# Altium PCB HBRIDGE_PCB.PcbDoc (part 2 of 2)
Units mm, origin at the board's own origin, x right, y up, seen from the top; angles counter-clockwise.
Board outline 96 x 74 mm, 4 copper layers (Top Layer, GND, VCC, Bottom Layer), stack 1.602 mm thick; 114 components, 69 nets, 304 pads, 210 vias.
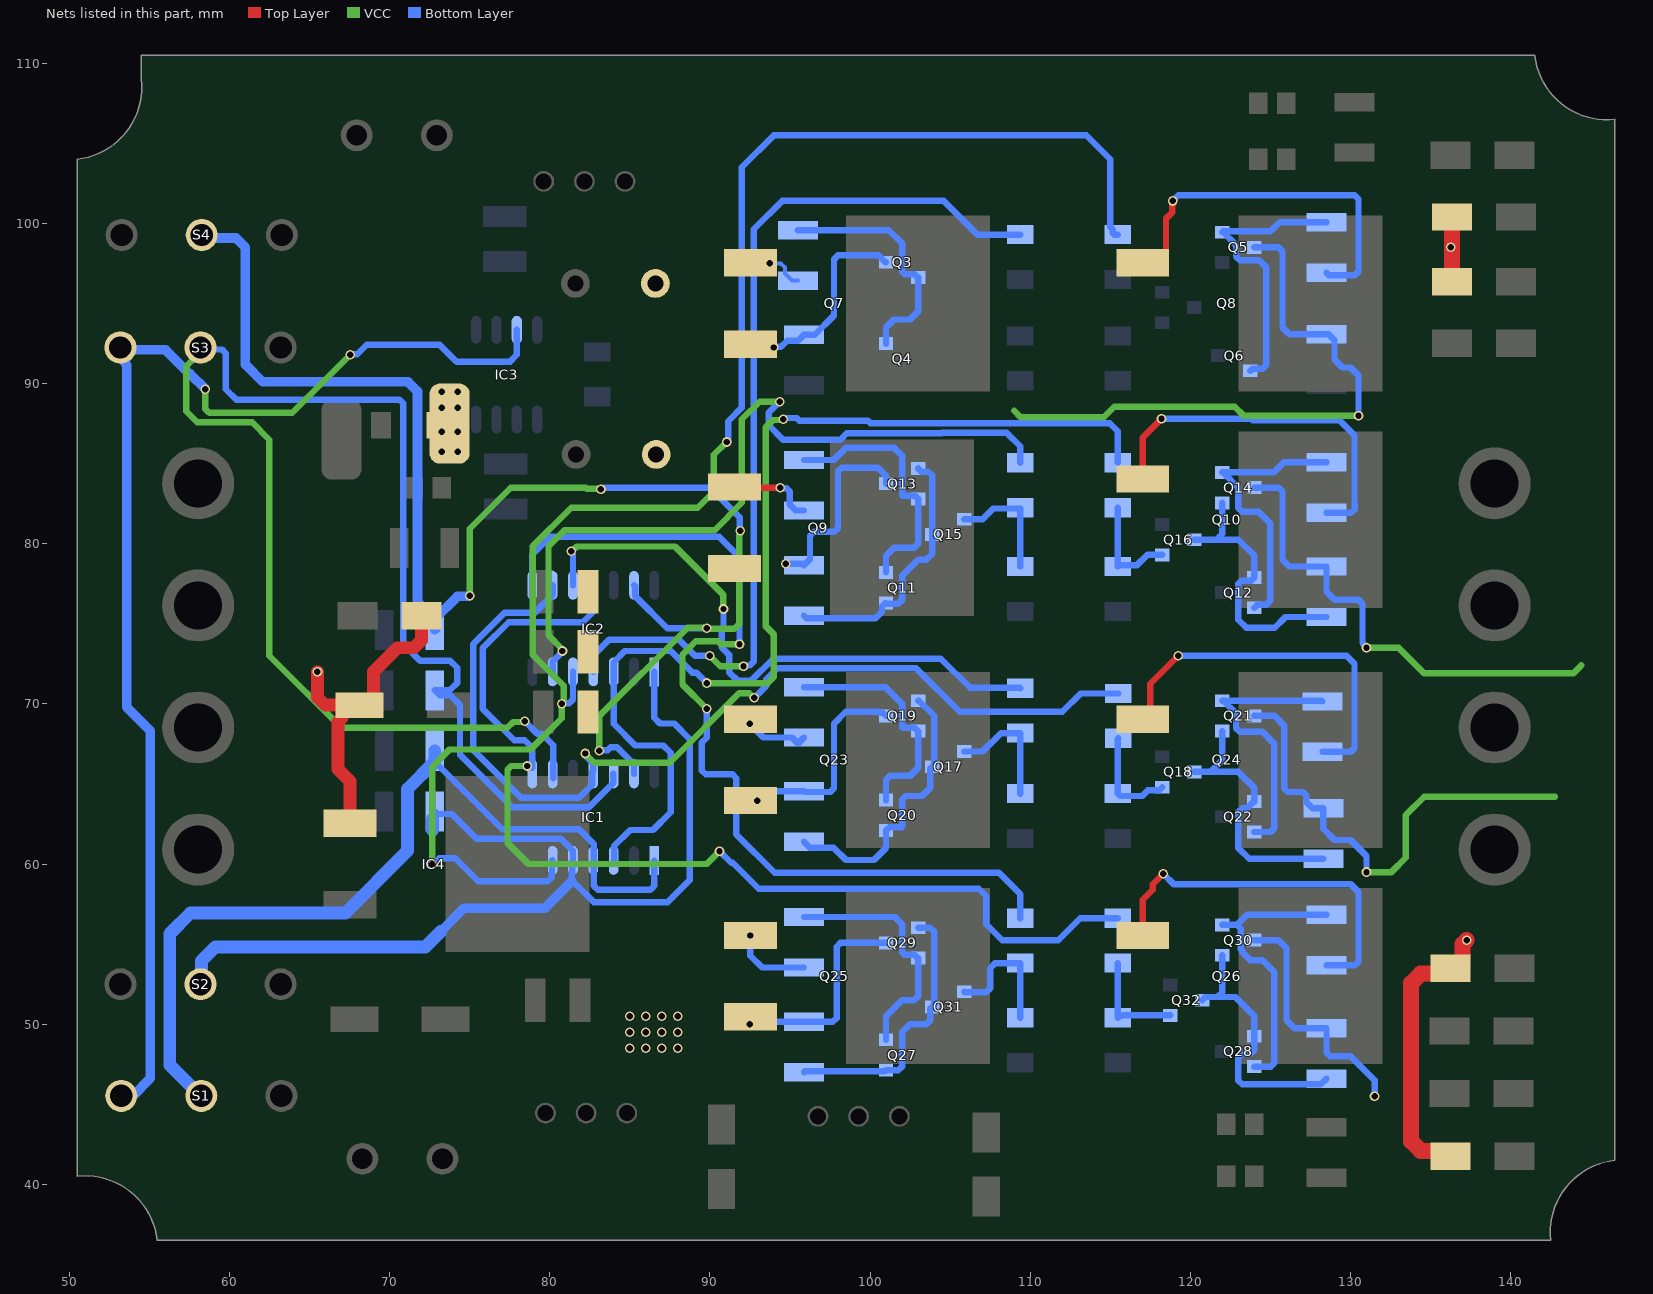
[diagram p4: the nets of this part, all layers, seen from the top]

## Via types
v1: diameter 0.6, hole 0.4, Top Layer to Bottom Layer, tented bottom, 127 vias
v2: diameter 0.6, hole 0.4, Top Layer to Bottom Layer, tented both sides, 83 vias

## Nets (pads, with @x,y where several pads share a name; then routed paths per layer and width w, separated by ;. In a path a pad name is that pad's centre, name@x,y a point inside that pad or via, vN(x,y) a via of type N, cw(c..) or ccw(c..) an arc to the next point about the centre after c; other vN are vias at no path point) (continued)
NetQ3_2: Q3.2 Q4.2 R8.1 | length 15.3
  Bottom Layer w0.4: R8.1@95.5,99.575 101.175,99.575 102,98.75 102,97 102.175,96.825 102.8,96.825 Q3.2@103,96.625 103,94.5 102.5,94 101.5,94 101,93.5 Q4.2@101,92.491
NetQ5_2: Q5.2 Q6.2 R7.1 | length 18
  Bottom Layer w0.4: Q5.2@122,99.45 122.05,99.5 125,99.5 125.575,100.075 R7.1@128.5,100.075 ; Q5.2@122.05,99.45 122.85,98.65 122.85,97.934 123.084,97.7 124.3,97.7 124.75,97.25 124.75,91.167 124.516,90.933 123.883,90.933 Q6.2@123.75,90.8
NetQ7_1: Q7.1 R8.2 | length 2.4
  Bottom Layer w0.254: v2(93.75,97.5) 94.425,97.5 94.693,97.232 94.693,96.873 95.141,96.425 R8.2@95.5,96.425
NetQ8_1: Q8.1 R7.2 | length 23.6
  Top Layer w0.4: Q8.1@117.028,97.54 117.828,97.54 118.478,98.19 118.478,100.3 118.862,100.684 118.862,101.362 v2(118.9,101.4)
  Bottom Layer w0.4: v2(118.9,101.4) 119.25,101.75 130.266,101.75 130.5,101.516 130.5,97 130.25,96.75 128.675,96.75 R7.2@128.5,96.925
NetQ9_1: Q9.1 R10.1 | length 5.4
  Top Layer w0.4: Q9.1@91.528,83.54 91.568,83.5 v2(94.4,83.5)
  Bottom Layer w0.4: v2(94.4,83.5) 94.438,83.462 94.785,83.462 94.987,83.26 94.987,82.45 95.362,82.075 R10.1@95.875,82.075
NetQ10_1: Q10.1 R11.1 | length 23.2
  Top Layer w0.4: Q10.1@117.028,84.04 117.028,86.628 v2(118.2,87.8)
  Bottom Layer w0.4: v2(118.2,87.8) 123.785,87.8 123.885,87.7 129.316,87.7 130.25,86.766 130.25,82.5 130.259,82.491 130.259,82.159 130.025,81.925 R11.1@128.5,81.925
NetQ11_1: Q11.1 Q13.1 Q15.3 R12.2 | length 16.8
  Bottom Layer w0.4: R12.2@95.875,75.5 96.041,75.334 100.334,75.334 100.75,75.75 100.75,76.1 100.766,76.1 100.966,76.3 Q11.1@101,76.3 101.05,76.25 101.766,76.25 102,76.484 102,78 103,79 103.5,79 103.875,79.375 Q15.3@103.875,80.575 103.875,84.266 103.641,84.5 103.2,84.5 Q13.1@103,84.7
NetQ11_2: Q11.2 Q13.2 R10.2 | length 16.4
  Bottom Layer w0.4: R10.2@95.875,85.225 97.725,85.225 98.5,86 101.5,86 102,85.5 102,82.984 102.816,82.984 Q13.2@103,82.8 103,80 102.75,79.75 101.5,79.75 101,79.25 Q11.2@101,78.2
NetQ12_1: Q12.1 Q14.1 Q16.3 R13.2 | length 17.4
  Bottom Layer w0.4: Q16.3@120.25,80.25 121.625,80.25 ; Q14.1@122,82.55 122,80.625 121.625,80.25 ; R13.2@128.5,75.425 125.937,75.425 125.262,74.75 123.5,74.75 123,75.25 123,77.5 123.2,77.7 123.8,77.7 Q12.1@124,77.9 124,79.25 123,80.25 121.625,80.25
NetQ12_2: Q12.2 Q14.2 R11.2 | length 17.7
  Bottom Layer w0.4: Q14.2@122,84.45 Q14.2@122.05,84.45 ; Q12.2@124,76 124.2,76.2 124.75,76.2 124.984,76.434 124.984,81.266 124.25,82 123.234,82 123,82.234 123,83.5 Q14.2@122.05,84.45 ; R11.2@128.5,85.075 125.825,85.075 125.2,84.45 Q14.2@122.05,84.45
NetQ15_1: Q15.1 R14.2 R16.1 | length 7.4
  Bottom Layer w0.4: Q15.1@105.875,81.525 107.025,81.525 107.7,82.2 109.375,82.2 R14.2@109.375,78.575
NetQ16_1: Q16.1 R15.2 R17.1 | length 6.8
  Bottom Layer w0.4: R17.1@115.475,82.25 R15.2@115.475,78.575 115.566,78.666 116.666,78.666 117.3,79.3 Q16.1@118.25,79.3
NetQ17_1: Q17.1 R18.2 R20.2 | length 7.8
  Bottom Layer w0.4: Q17.1@105.875,67.025 107.025,67.025 108.175,68.175 R18.2@109.375,68.175 R20.2@109.375,64.4
NetQ17_3: Q17.3 Q19.1 Q20.1 R22.2 | length 17.9
  Bottom Layer w0.4: R22.2@95.875,61.4 96.25,61.025 97.725,61.025 98.5,60.25 100.25,60.25 101,61 Q20.1@101,62.091 101.2,62.291 101.966,62.291 102,62.325 102,64.016 102.234,64.25 103.25,64.25 103.75,64.75 103.75,65.95 Q17.3@103.875,66.075 104.016,66.216 104.016,69.25 104,69.25 103.05,70.2 Q19.1@103,70.2
NetQ18_1: Q18.1 R19.2 R21.2 | length 6.5
  Bottom Layer w0.4: R19.2@115.5,67.85 115.475,67.825 R21.2@115.475,64.4 115.625,64.25 117,64.25 117.35,64.6 118.05,64.6 Q18.1@118.25,64.8
NetQ18_3: Q18.3 Q21.1 Q22.1 R23.2 | length 17
  Bottom Layer w0.4: Q18.3@120.25,65.75 121.25,65.75 ; Q21.1@122,68.3 122,66.5 121.25,65.75 ; R23.2@128.3,60.325 123.675,60.325 123,61 123,63.25 123.234,63.484 123.534,63.484 123.95,63.9 Q22.1@124,63.9 124,64.75 123.125,65.625 123,65.75 121.25,65.75
NetQ19_2: Q19.2 Q20.2 R25.1 | length 15
  Bottom Layer w0.4: R25.1@95.875,71.05 100.95,71.05 102,70 102,68.534 102.034,68.5 102.8,68.5 Q19.2@103,68.3 103,66 102.5,65.5 101.25,65.5 101,65.25 Q20.2@101,63.991
NetQ21_2: Q21.2 Q22.2 R24.1 | length 17.7
  Bottom Layer w0.4: Q21.2@122,70.2 Q21.2@122.05,70.2 ; Q22.2@124,62 125,62 125.25,62.25 125.25,67.5 124.5,68.25 123.084,68.25 122.85,68.484 122.85,69.4 Q21.2@122.05,70.2 ; R24.1@128.25,70.15 128.2,70.2 Q21.2@122.05,70.2
NetQ23_1: Q23.1 R25.2 | length 4
  Bottom Layer w0.4: v2(92.5,68.75) 93.35,67.9 95.125,67.9 95.5,67.525 R25.2@95.875,67.9
NetQ24_1: Q24.1 R24.2 | length 23.4
  Top Layer w0.4: Q24.1@117.028,69.04 117.5,69.512 117.5,71.25 v2(119.25,73)
  Bottom Layer w0.4: v2(119.25,73) 129.75,73 130.25,72.5 130.25,67.25 130,67 R24.2@128.25,67
NetQ25_1: Q25.1 R27.1 | length 4.9
  Bottom Layer w0.4: v2(92.528,55.54) 92.528,54.276 93.261,53.543 R27.1@95.875,53.543
NetQ26_1: Q26.1 R28.1 | length 23.5
  Top Layer w0.4: Q26.1@117.028,55.54 117.028,57.778 117.647,58.397 117.647,58.747 v2(118.3,59.4)
  Bottom Layer w0.4: v2(118.3,59.4) 118.95,58.75 130,58.75 130.5,58.25 130.5,53.909 130.266,53.675 R28.1@128.5,53.675
NetQ27_1: Q27.1 Q29.1 Q31.3 R29.2 | length 17.2
  Bottom Layer w0.4: R29.2@95.875,47 95.938,47.062 100.937,47.062 Q27.1@101,47.125 101.766,47.125 102,47.359 102,49.5 102.5,50 103.516,50 103.75,50.234 103.75,50.95 Q31.3@103.875,51.075 104,51.2 104,55.791 103.766,56.025 Q29.1@103,56.025
NetQ27_2: Q27.2 Q29.2 R27.2 | length 15.6
  Bottom Layer w0.4: R27.2@95.875,56.693 101.557,56.693 101.749,56.5 102,56.25 102,54.5 102.175,54.325 102.8,54.325 Q29.2@103,54.125 103,51.734 102.766,51.5 102,51.5 101,50.5 Q27.2@101,49.025
NetQ28_1: Q28.1 Q30.1 Q32.3 R30.2 | length 17
  Bottom Layer w0.4: Q32.3@120.75,51.5 120.95,51.7 121.7,51.7 ; Q30.1@122,54.3 122,52 121.7,51.7 ; R30.2@128.5,46.6 128.15,46.25 123.234,46.25 123,46.484 123,47.916 123.234,48.15 123.766,48.15 124,48.384 Q28.1@124,49.25 124,50.5 122.8,51.7 121.7,51.7
NetQ28_2: Q28.2 Q30.2 R28.2 | length 18.1
  Bottom Layer w0.4: Q30.2@122,56.2 122.916,56.2 ; Q28.2@124,47.35 125.016,47.35 125.25,47.584 125.25,53.25 124.5,54 123.75,54 123.227,54.523 123.227,54.607 123.15,54.684 123.15,55.966 122.916,56.2 ; R28.2@128.5,56.825 123.541,56.825 122.916,56.2
NetQ31_1: Q31.1 R31.2 R33.1 | length 8.4
  Bottom Layer w0.4: Q31.1@105.875,52.025 105.9,52 107.266,52 107.5,52.234 107.5,53.5 107.818,53.818 R33.1@109.375,53.818 R31.2@109.375,50.4
NetQ32_1: Q32.1 R32.2 R34.1 | length 6.7
  Bottom Layer w0.4: R34.1@115.475,53.818 R32.2@115.475,50.4 cw(c115.837,50.038) 115.837,50.55 Q32.1@118.75,50.55
NetR1_1: IC2.4 R1.1 | length 57.5
  VCC w0.4: v2(90,73) 90.645,72.355 v2(92.099,72.355)
  Bottom Layer w0.4: IC2.4@82.725,72 82.763,72.038 82.763,73.063 83.7,74 88.075,74 89.075,73 v2(90,73) ; v2(92.099,72.355) 92.137,72.393 92.498,72.393 92.75,72.646 92.75,99.64 94.51,101.4 104.6,101.4 106.7,99.3 R1.1@109.375,99.3
NetR2_1: IC1.6 IC2.5 R2.1 | length 101.9
  VCC w0.4: v2(72.676,59.989) 72.676,66.076 73.75,67.15 78.8,67.15 80.75,69.1 v2(80.75,70) ; v2@80.875,70.175 80.875,71.125 78.95,73.05 78.95,79.851 81.349,82.25 89.25,82.25 90.25,83.25 90.25,85.55 v2(91.05,86.35)
  Bottom Layer w0.4: v2(72.676,59.989) 72.731,59.989 73.103,60.361 74.1,60.361 75.536,58.925 79.885,58.925 80.12,59.159 80.12,59.418 80.147,59.445 80.147,60.218 IC1.6@80.175,60.247 ; v2(80.75,70) 80.788,70.038 81.221,70.038 81.455,70.273 IC2.5@81.455,72 ; v2(91.05,86.35) 91.054,86.354 91.15,86.354 91.15,87.65 92,88.5 92,103.5 94,105.5 113.5,105.5 115,104 115,99.775 115.15,99.625 115.15,99.4 115.25,99.3 R2.1@115.475,99.3
NetR16_2: IC2.6 R16.2 | length 49.1
  VCC w0.4: v2(80.796,73.3) 80.758,73.338 80.758,73.442 79.925,74.275 79.925,79.85 80.925,80.85 90.3,80.85 92,82.55 92,87.765 93.108,88.873 v2(94.358,88.873)
  Bottom Layer w0.4: IC2.6@80.185,72 80.185,72.644 80.796,73.256 v2(80.796,73.3) ; v2(94.358,88.873) 93.675,88.19 93.675,87.39 94.565,86.5 98.151,86.5 98.551,86.9 104.475,86.9 104.5,86.925 108.525,86.925 109.375,86.075 R16.2@109.375,85.05
NetR17_2: IC1.3 IC2.3 R17.2 | length 68.8
  VCC w0.4: v2(89.8,71.3) 93.615,71.3 94,71.685 94,74.33 93.5,74.83 93.5,87.283 93.942,87.725 94.537,87.725 v2(94.575,87.763)
  Bottom Layer w0.4: IC1.3@84.033,60.225 84.033,61.138 85.02,62.125 86.45,62.125 87.55,63.225 87.55,66.95 87.1,67.4 85.349,67.4 83.995,68.754 IC2.3@83.995,72 83.995,72.6 84.695,73.3 87.552,73.3 88.898,71.954 89.146,71.954 v2(89.8,71.3) ; v2(94.575,87.763) 94.629,87.763 94.716,87.85 95.423,87.85 95.585,87.687 99.863,87.687 100.025,87.525 114.975,87.525 115.475,87.025 R17.2@115.475,85.05
NetR18_1: IC2.10 R18.1 | length 37.8
  VCC w0.4: v2(81.35,79.525) 81.384,79.525 81.684,79.825 87.825,79.825 90.825,76.825 90.825,75.95 v2(90.85,75.925)
  Bottom Layer w0.4: v2(81.35,79.525) 81.35,79.471 81.455,79.366 IC2.10@81.455,77.4 ; v2(90.85,75.925) 90.85,74.747 90.75,74.647 90.75,73.523 91.199,73.074 91.199,71.982 91.726,71.455 92.585,71.455 93.955,72.825 104.425,72.825 106.25,71 109.35,71 R18.1@109.375,70.975
NetR19_1: IC1.11 IC2.9 R19.1 | length 62.7
  VCC w0.4: v2(82.229,66.9) 82.229,66.88 82.788,66.321 87.487,66.321 91.825,70.658 92.451,70.658 92.681,70.428 92.745,70.428 v2(92.783,70.39)
  Bottom Layer w0.4: IC2.9@80.185,77.4 80.185,76.8 79.085,75.7 77.19,75.7 75.225,73.735 75.225,67.125 77.379,64.971 78.2,64.15 81.85,64.15 82.66,64.96 82.66,65.77 82.725,65.835 82.725,66.279 82.267,66.737 82.267,66.862 v2(82.229,66.9) ; v2(92.783,70.39) 93.512,71.119 93.512,71.534 94.203,72.225 102.875,72.225 105.6,69.5 112,69.5 113.15,70.65 R19.1@115.5,70.65
NetR33_2: IC2.8 R33.2 | length 59.8
  VCC w0.4: v2(89.8,69.7) 88.291,71.209 88.291,73.063 89.127,73.9 90.506,73.9 90.675,73.731 v2(91.85,73.731)
  Bottom Layer w0.4: IC2.8@78.915,77.4 78.915,79.315 80.025,80.425 90.575,80.425 91.85,79.15 v2(91.85,73.731) ; v2(89.8,69.7) 89.8,67.89 89.5,67.59 89.5,65.834 89.734,65.6 91.416,65.6 91.65,65.365 91.65,61.85 94.05,59.45 108.05,59.45 109.375,58.125 R33.2@109.375,56.618
NetR34_2: IC1.8 IC2.11 R34.2 | length 67.8
  VCC w0.4: v2(78.593,66.121) 77.606,66.121 77.366,65.881 77.366,61.309 78.675,60 89.8,60 v2(90.6,60.8)
  Bottom Layer w0.4: v2(78.593,66.121) 78.643,66.071 78.844,66.071 78.915,66 78.915,67.246 78.433,67.728 77.782,67.728 75.825,69.685 75.825,73.487 77.438,75.1 82.069,75.1 82.725,75.756 IC2.11@82.725,77.4 ; v2(90.6,60.8) 91.328,60.072 91.428,60.072 93.05,58.45 106.781,58.45 107.25,57.981 107.25,56.25 108.25,55.25 111.75,55.25 113.118,56.618 R34.2@115.475,56.618
NetR36_2: IC1.1 IC1.4 R36.2 S1.2 | length 55.4
  Bottom Layer w0.4: R36.2@72.825,66.383 77.033,62.175 81.834,62.175 82.763,61.245 82.763,58.634 82.998,58.4 86.291,58.4 86.525,58.634 IC1.1@86.525,60.214
  Bottom Layer w0.8: S1.2@58.412,45.313 56.275,47.45 56.275,55.65 57.575,56.95 67.25,56.95 71.125,60.825 71.125,64.683 72.825,66.383 R36.2@72.825,67.058
NetR37_2: IC1.9 IC1.12 R37.2 S3.2 | length 100.1
  VCC w0.4: S3.2@57.984,92.126 57.984,91.766 57.3,91.081 57.3,88.276 58.001,87.575 61.425,87.575 62.5,86.5 62.5,73 67,68.5 77.35,68.5 77.72,68.87 78.412,68.87 v2(78.45,68.908)
  Bottom Layer w0.4: S3.2@58.2,92.25 58.322,92.128 59.541,92.128 59.775,91.894 59.775,89.648 60.423,89 70.616,89 70.85,88.766 70.85,73.758 71.908,72.7 73.775,72.7 74.225,72.25 74.225,71.3 73.767,70.842 R37.2@72.825,70.842 73.132,70.534 73.791,70.534 74.4,69.925 74.4,66.825 77.675,63.55 82.45,63.55 83.825,64.925 83.841,64.925 83.975,65.059 IC1.12@83.975,65.633 ; v2(78.45,68.908) 79.211,68.147 79.503,68.147 80.225,67.425 80.225,66.406 80.223,66.405 IC1.9@80.223,65.368
NetR38_2: IC1.13 IC2.13 R38.2 S4.2 | length 92.3
  VCC w0.4: v2(75,76.75) 75,80.925 77.575,83.5 82.246,83.5 82.308,83.438 83.162,83.438 v2(83.2,83.4) ; v2(83.1,67.075) 83.1,69.24 88.616,74.756 89.762,74.756 89.838,74.68 91.526,74.68 91.834,74.988 91.834,80.534 91.862,80.562 91.862,80.762 v2(91.9,80.8)
  Bottom Layer w0.4: v2(83.1,67.075) 83.138,67.113 83.623,67.113 83.8,67.29 84.2,67.29 85.265,66.225 IC1.13@85.265,65.625 ; v2(83.2,83.4) 83.238,83.438 83.338,83.438 83.4,83.5 90,83.5 91.862,81.638 91.862,80.838 v2(91.9,80.8) ; IC2.13@85.265,77.4 85.33,77.335 85.33,76.735 87.347,74.718 v2(89.8,74.718)
  Bottom Layer w0.6: S4.2@58.275,99.275 58.466,99.084 60.414,99.084 61,98.498 61,91.186 62.086,90.1 71.164,90.1 71.75,89.514 71.75,76.375 R38.2@72.825,75.3 ; R38.2@72.912,74.712 R38.2@72.825,74.625 R38.2@72.825,75.3 ; v2(75,76.75) 74.962,76.712 74.237,76.712 R38.2@72.825,75.3
NetR39_2: IC1.5 IC2.1 R39.2 S2.2 | length 61.8
  Bottom Layer w0.4: R39.2@72.825,63.275 72.975,63.125 73.875,63.125 75.425,61.575 80.705,61.575 81.455,60.825 IC1.5@81.455,60.225 81.417,60.187 81.417,59.445 81.375,59.404 81.375,58.915 ; 81.417,58.957 82.748,57.625 87.376,57.625 88.75,58.999 88.75,67.8 87.775,68.775 86.886,68.775 86.535,69.126 IC2.1@86.535,72
  Bottom Layer w0.6: 73.2,55.794 74.656,57.25 79.71,57.25 81.375,58.915
  Bottom Layer w0.8: S2.2@58.2,52.5 58.256,52.556 58.256,53.956 59.125,54.825 72.231,54.825 73.2,55.794 ; R39.2@72.675,62.125 R39.2@72.675,62.8
NetS1_1: IC3.3 S1.1 S3.1 | length 79.1
  VCC w0.4: v2(58.5,89.651) 58.5,88.409 58.734,88.175 63.925,88.175 v2(67.55,91.8)
  Bottom Layer w0.4: v2(67.55,91.8) 67.588,91.838 67.988,91.838 68.575,92.425 73.125,92.425 74.185,91.365 77.527,91.365 77.95,91.788 IC3.3@77.95,93.35
  Bottom Layer w0.6: S3.1@53.2,92.25 53.563,91.887 53.468,91.791 53.468,91.294 53.59,91.172 53.59,69.796 55.072,68.314 55.072,46.628 53.944,45.5 S1.1@53.6,45.5 ; S3.1@53.563,92.103 56.014,92.103 57.517,90.6 57.551,90.6 v2(58.5,89.651)
VCC: C1.1 C2.2 C3.1 C4.2 C7.1 C8.2 D1.2 D5.2 D7.2 D11.2 D15.2 F1.2 IC4.1 pad.18@73.75,87.5 Q3.3 Q5.3 Q7.3 Q9.3 Q13.3 Q14.3 Q19.3 Q21.3 Q23.3 Q25.3 Q29.3 Q30.3 R5.1 R6.1 R12.1 R13.1 R22.1 R23.1 R29.1 R30.1 | length 207.2
  Top Layer w0.4: v2(92.5,50) 92.5,50.432 Q25.3@92.528,50.46
  Top Layer w0.8: v2(65.5,72) 65.5,70.394 65.969,69.925 C7.1@67.425,69.925 ; IC4.1@67.528,62.54 67.528,65.17 66.775,65.923 66.775,68.882 67.025,69.132 67.025,69.525 C7.1@67.425,69.925 ; D15.2@72,75.5 72,73.969 71.531,73.5 70.5,73.5 69,72 69,70.325 68.6,69.925 C7.1@68.125,69.925 C7.1@67.425,69.925
  Top Layer w1: D7.2@136.25,41.75 135.907,42.093 134.372,42.093 133.786,42.679 133.786,52.571 134.372,53.157 135.907,53.157 D11.2@136.25,53.5 136.65,53.5 137,53.85 137,55 v2(137.25,55.25) ; D1.2@136.325,96.35 D5.2@136.325,100.4
  VCC w0.4: 109,88.3 109.4,87.9 114.6,87.9 115.254,88.554 122.769,88.554 123.323,88 v2(130.5,88) ; v2(131,59.5) 132.561,59.5 133.457,60.396 133.457,63.057 134.6,64.2 142.764,64.2 ; v2(131,73.5) 133,73.5 134.6,71.9 143.9,71.9 144.4,72.4
  Bottom Layer w0.4: v2(92.5,50) 92.554,50 92.704,50.15 97.681,50.15 97.916,50.384 97.916,54.841 98.15,55.075 Q29.3@101,55.075 ; v2(92.95,63.96) 93.004,63.96 93.594,64.55 R22.1@95.875,64.55 95.925,64.5 97.516,64.5 97.75,64.734 97.75,68.766 98.484,69.5 100.516,69.5 100.566,69.45 100.8,69.45 Q19.3@101,69.25 ; v2(94,92.25) 94.038,92.288 94.438,92.288 94.825,92.675 95.5,92.675 R5.1@95.875,93.05 96.55,93.05 97.75,94.25 97.75,97.75 98,98 100.525,98 100.95,97.575 Q3.3@101,97.575 ; v2(94.75,78.75) 95.771,78.75 95.873,78.648 96.25,79.025 96.25,80.5 96.5,80.75 97.766,80.75 98,80.984 98,84.516 98.234,84.75 100.5,84.75 101,84.25 Q13.3@101,83.75 ; Q30.3@124,55.25 125.5,55.25 126,54.75 126,50.25 126.5,49.75 R30.1@128.5,49.75 128.5,48.234 128.734,48 130,48 131.5,46.5 v2(131.5,45.5) ; Q21.3@124,69.25 125.25,69.25 125.85,68.65 125.85,64.734 126.084,64.5 127.016,64.5 127.25,64.266 127.25,63.85 127.625,63.475 R23.1@128.3,63.475 128.3,62.2 129,61.5 130,61.5 131,60.5 v2(131,59.5) ; Q14.3@124,83.5 125.516,83.5 125.75,83.266 125.75,79 126,78.749 126.175,78.575 R13.1@128.5,78.575 128.5,77 129,76.5 130.5,76.5 130.75,76.25 130.75,73.804 131,73.554 v2(131,73.5) ; Q5.3@124,98.5 125.5,98.5 125.75,98.25 125.75,93.5 126,93.249 126.175,93.075 R6.1@128.5,93.075 128.625,93.075 129,92.7 129,91.5 129.5,91 130,91 130.5,90.5 v2(130.5,88)
  other v1: 85,48.5 86,48.5 87,48.5 88,48.5 85,49.5 86,49.5 87,49.5 88,49.5 85,50.5 86,50.5 87,50.5 88,50.5
  other v2: 73.25,85.75 74.25,85.75 73.25,87 74.25,87 73.25,88.5 74.25,88.5 73.25,89.5 74.25,89.5 136.25,98.5
pads on no net: Q8.3 Q10.3 Q24.3 Q26.3

## Polygon pours and split planes (outlines as drawn)
GND on GND "NONET_L-01_P-001" (solid, pour order 0): 55.75,37 55.75,38.46 ccw(c53.21,38.46) 53.21,41 50.75,41 50.75,103.25 52.71,103.25 ccw(c52.71,105.79) 55.25,105.79 55.25,109.75 ccw(c55.5,109.75) 55.5,109.5 141,109.5 141,108.29 ccw(c143.54,108.29) 143.54,105.75 146,105.75 ccw(c146,105.5) 145.75,105.5 145.75,42 144.29,42 ccw(c144.29,39.46) 141.75,39.46 141.75,37
VCC on VCC "NONET_L-01_P-001" (solid, pour order 1): 55.709,36.831 55.709,38.041 ccw(c53.169,38.041) 53.169,40.581 50.709,40.581 50.709,103.581 52.419,103.581 ccw(c52.419,106.121) 54.959,106.121 54.959,110.081 ccw(c55.209,110.081) 55.209,109.831 140.959,109.831 140.959,108.371 ccw(c143.499,108.371) 143.499,105.831 145.959,105.831 cw(c145.959,105.581) 146.209,105.581 146.209,41.581 144.749,41.581 ccw(c144.749,39.041) 142.209,39.041 142.209,36.581 ccw(c141.959,36.581) 141.959,36.831

## Keep-outs
Keep-Out Layer:
  lines w0.5: 54.5,110.5 54.5,109 cw(c50,108.5) 50.5,104 50.5,40.5 cw(c51,36) 55.5,36.5 65,36.5 142.5,36.5 cw(c147,37) 146.5,41.5 146.5,106.5 cw(c146,111) 141.5,110.5 60,110.5 54.5,110.5 ; 54.5,110.5 54.5,110.5

## Other copper
Top Layer:
  region net VCC: 86.948,47 ccw(c86.948,49.54) 88.744,47.744 89,48 89,99 88.707,99.293 ccw(c87,97.586) 87,100 86.052,100 ccw(c86.052,97.46) 84.256,99.256 84,99 84,48 84.256,47.744 ccw(c86.052,49.54) 86.052,47 87,47
  region net NetF1_1: 67,89.75 68.5,89.75 cw(c68.5,87.5) 70.75,87.5 70.75,85.75 cw(c68.453,85.75) 68.453,83.453
  region net NetF1_1: 56.25,79.25 cw(c56.25,80.25) 55.25,80.25 55.25,86 cw(c56.25,86) 56.25,87 64.25,87 cw(c64.25,86.75) 64.5,86.75 ccw(c64.5,87.5) 65.25,87.5 65.25,88.75 cw(c66.25,88.75) 66.25,89.75 67.75,89.75 cw(c67.75,89) 68.5,89 68.5,83.453 65.5,83.25 ccw(c65.5,81.75) 64,81.75 64,80 cw(c63.25,80) 63.25,79.25
  region net VCC: 84.5,71.875 83.75,71.125 82.104,71.125 ccw(c82.104,70.272) 81.5,70.875 81.5,68.125 81.573,68.052 ccw(c82,68.479) 82,67.875 83.75,67.875 84.5,67.125
  region net VCC: 84.396,75.75 83.646,75 82,75 ccw(c82,74.147) 81.396,74.75 81.396,72 81.47,71.927 ccw(c81.896,72.354) 81.896,71.75 83.646,71.75 84.396,71
  region net VCC: 84.5,79.375 83.75,78.625 82.104,78.625 ccw(c82.104,77.772) 81.5,78.375 81.5,75.625 81.573,75.552 ccw(c82,75.979) 82,75.375 83.75,75.375 84.5,74.625
  region net GND: 114,52.5 115.5,52 119,52 cw(c119,51) 120,51 120,49.5 cw(c119.5,49.5) 119.5,49 115.5,49 114,48.5
  region net GND: 114,66 115.5,65.5 119,65.5 cw(c119,64.5) 120,64.5 120,63 cw(c119.5,63) 119.5,62.5 115.5,62.5 114,62
  region net GND: 114,80.5 115.5,80 119,80 cw(c119,79) 120,79 120,77.5 cw(c119.5,77.5) 119.5,77 115.5,77 114,76.5
  region net GND: 109.5,40.5 ccw(c110.5,40.5) 110.5,39.5 113.5,39.5 ccw(c113.5,40.05) 114.05,40.05 ccw(c114.05,40.5) 114.5,40.5 114.5,106.5 ccw(c113.5,106.5) 113.5,107.5 110.5,107.5 ccw(c110.5,106.5) 109.5,106.5 109.5,94
  region net GND: 114,94.5 115.5,94 119,94 cw(c119,93) 120,93 120,91.5 cw(c119.5,91.5) 119.5,91 115.5,91 114,90.5
  region net VCC: 88.5,94.5 90,94 93.5,94 cw(c93.5,93) 94.5,93 94.5,91.5 cw(c94,91.5) 94,91 90,91 88.5,90.5
  region net VCC: 88,80.5 89.5,80 93,80 cw(c93,79) 94,79 94,77.5 cw(c93.5,77.5) 93.5,77 89.5,77 88,76.5
  region net VCC: 88.75,66.25 90.25,65.75 93.75,65.75 cw(c93.75,64.75) 94.75,64.75 94.75,63.25 cw(c94.25,63.25) 94.25,62.75 90.25,62.75 88.75,62.25
  region net VCC: 89,52.5 90.5,52 94,52 cw(c94,51) 95,51 95,49.5 cw(c94.5,49.5) 94.5,49 90.5,49 89,48.5
VCC:
  rectangle net +1: 98.5,89.5 132.5,100.5
  rectangle net -1: 98,76 132,87
  rectangle net +2: 98.5,61 132.5,72
  rectangle net -2: 98.5,47.5 132.5,58.5
  region net +1: 131,100.5 132,100.5 cw(c132,99) 133.5,99 133.5,94.393 ccw(c138.393,94.393) 138.393,89.5 139.46,89.5 cw(c139.46,86.96) 142,86.96 142,82.5 cw(c140.5,82.5) 140.5,81 136.5,81 cw(c136.5,83.5) 134,83.5 134,87.5 ccw(c132,87.5) 132,89.5
  region net -1: 130.964,87.02 cw(c130.964,85.02) 132.964,85.02 132.964,81.56 ccw(c135.504,81.56) 135.504,79.02 139.964,79.02 cw(c139.964,77.02) 141.964,77.02 141.964,75.52 cw(c139.464,75.52) 139.464,73.02 135.964,73.02 cw(c135.964,74.52) 134.464,74.52 ccw(c132.964,74.52) 132.964,76.02 131.464,76.02
  region net +2: 131.5,72 ccw(c132.5,72) 132.5,71 141,71 cw(c141,69.5) 142.5,69.5 142.5,67 cw(c140.5,67) 140.5,65 133,65 ccw(c133,64.5) 132.5,64.5 132.5,61 131.5,61
  region net -2: 132,58.5 132.5,58.5 ccw(c132.5,60.5) 134.5,60.5 134.5,60.96 cw(c137.04,60.96) 137.04,63.5 140.5,63.5 cw(c140.5,62.5) 141.5,62.5 141.5,58.5 cw(c140.5,58.5) 140.5,57.5 140,57.5 ccw(c140,51.5) 134,51.5 134,49.5 cw(c132,49.5) 132,47.5

## Silkscreen, mask and mechanical layers (free items; w line width, h text height)
Bottom Overlay:
  circle w1.2: c88.7,70.725 r0.05
  circle w1.2: c88.825,58.575 r0.05
  lines w0.5: 50.8,88.8 50.8,56 ; 50.8,95.7 65.2,95.7 ; 56,42.2 56,37.3 60.4,37.3 75.9,37.3 ; 56.481,102.9 50.775,102.9 50.775,91.575 50.775,88.825 65.175,88.825 ; 65.2,56 50.8,56 ; 65.25,49.05 50.8,49.05 ; 65.3,42.2 65.3,44.9 65.3,47.9 ; 65.3,42.25 50.8,42.25 50.8,49.05 ; 65.3,45.475 65.3,102.6 65,102.9 60.294,102.9 56.2,102.9 56.2,109.562 59.2,109.562 65.437,109.562 75.763,109.562 75.763,101.4 ; 65.3,102.8 65.3,101.4 82.9,101.4 90,101.4 ; 65.348,42.703 65.2,45.5 94.3,45.5 112.6,45.5 ; 75.9,45.5 75.9,37.3 ; 76.2,101.5 76.2,109.7 90,109.7 90,106 ; 88.4,45.5 88.4,37.3 ; 90,45.5 90,75.15 90,106 ; 105.4,45.3 105.4,37.3 88.4,37.3 ; 112.75,106 112.75,44.8 129.125,44.8 132.5,44.8 132.5,56 ; 50.8,49.05 50.8,56 ; 75.9,37.3 88.4,37.3 ; 90,106 113.5,106 130.85,106 132.4,106 132.5,105.9 132.5,90 ; 132.5,56 132.5,90 ; 132.5,56 146.15,56 146.15,90 132.5,90
  text "IC LEFT CONTROLLER" at 74.9,107.3 h1
  text "MANUEL2" at 86.7,107.3 h1
  text "N-MOS DRIVER" at 131.4,103.4 h1
  text "P-MOS DRIVER" at 111.5,103.3 h1
  text "IN2" at 67.154,102.854 h0.8
  text "DIR2" at 71.454,102.854 h0.8
  text "IC" at 88.7,99.3 h1
  text "SWITCH LEFT MANUEL" at 64.4,96.7 h0.7
  text "SWITCH LEFT PWM" at 63.3,89.6 h0.8
  text "+1" at 144.321,86.771 h1.52 r90
  text "MOTOR OUTPUT PIN" at 135.05,86.25 h1.5 r90
  text "VCC" at 52.954,83.604 h1.52 r270
  text "-1" at 144.446,79.346 h1.52 r90
  text "GND" at 52.754,76.054 h1.52 r270
  text "+2" at 144.371,71.446 h1.52 r90
  text "GND" at 52.754,68.654 h1.52 r270
  text "-2" at 144.446,64.146 h1.52 r90
  text "MOTOR INPUT PIN" at 62.725,62.125 h1.5 r270
  text "+5V" at 52.754,60.679 h1.52 r270
  text "SWITCH RIGHT MANUEL" at 64.4,49.8 h0.7
  text "DIR1" at 70.046,43.754 h0.8
  text "IN1" at 74.246,43.754 h0.8
  text "SWITCH RIGHT PWM" at 64.2,42.9 h0.8
  text "MANUEL1" at 84.8,38.2 h1
  text "POTANTIOMETER" at 103.3,38.2 h1
  text "IC RIGHT CONTROLLER" at 75.2,38.1 h1
Top Solder:
  region: 84.5,79.375 83.75,78.625 82.104,78.625 ccw(c82.104,77.772) 81.5,78.375 81.5,75.625 81.573,75.552 ccw(c82,75.979) 82,75.375 83.75,75.375 84.5,74.625
  region: 84.396,75.75 83.646,75 82,75 ccw(c82,74.147) 81.396,74.75 81.396,72 81.47,71.927 ccw(c81.896,72.354) 81.896,71.75 83.646,71.75 84.396,71
  region: 84.5,71.875 83.75,71.125 82.104,71.125 ccw(c82.104,70.272) 81.5,70.875 81.5,68.125 81.573,68.052 ccw(c82,68.479) 82,67.875 83.75,67.875 84.5,67.125
  region: 86.948,47 ccw(c86.948,49.54) 88.744,47.744 89,48 89,99 88.707,99.293 ccw(c87,97.586) 87,100 86.052,100 ccw(c86.052,97.46) 84.256,99.256 84,99 84,48 84.256,47.744 ccw(c86.052,49.54) 86.052,47 87,47
  region: 114,52.5 115.5,52 119,52 cw(c119,51) 120,51 120,49.5 cw(c119.5,49.5) 119.5,49 115.5,49 114,48.5
  region: 114,66 115.5,65.5 119,65.5 cw(c119,64.5) 120,64.5 120,63 cw(c119.5,63) 119.5,62.5 115.5,62.5 114,62
  region: 114,80.5 115.5,80 119,80 cw(c119,79) 120,79 120,77.5 cw(c119.5,77.5) 119.5,77 115.5,77 114,76.5
  region: 109.5,40.5 ccw(c110.5,40.5) 110.5,39.5 113.5,39.5 ccw(c113.5,40.05) 114.05,40.05 ccw(c114.05,40.5) 114.5,40.5 114.5,106.5 ccw(c113.5,106.5) 113.5,107.5 110.5,107.5 ccw(c110.5,106.5) 109.5,106.5 109.5,94
  region: 114,94.5 115.5,94 119,94 cw(c119,93) 120,93 120,91.5 cw(c119.5,91.5) 119.5,91 115.5,91 114,90.5
  region: 88.5,52.5 90,52 93.5,52 cw(c93.5,51) 94.5,51 94.5,49.5 cw(c94,49.5) 94,49 88.5,49
  region: 88.75,66.25 90.25,65.75 93.75,65.75 cw(c93.75,64.75) 94.75,64.75 94.75,63.25 cw(c94.25,63.25) 94.25,62.75 90.25,62.75 88.75,62.25
  region: 88,80.5 89.5,80 93,80 cw(c93,79) 94,79 94,77.5 cw(c93.5,77.5) 93.5,77 89.5,77 88,76.5
  region: 88.5,94.5 90,94 93.5,94 cw(c93.5,93) 94.5,93 94.5,91.5 cw(c94,91.5) 94,91 88.5,91
  lines w1: 55.725,36.75 ccw(c51.225,36.275) 50.75,40.775 50.75,103.675 ccw(c49.513,109.012) 54.85,110.25 141.275,110.25 ccw(c145.775,110.725) 146.25,106.225 146.25,41.725 ccw(c146.725,37.225) 142.225,36.75 55.8,36.75 ; 55.825,36.625 ccw(c51.325,36.15) 50.85,40.65 50.85,103.55 ccw(c49.612,108.887) 54.95,110.125 141.375,110.125 ccw(c145.875,110.6) 146.35,106.1 146.35,41.6 ccw(c146.825,37.1) 142.325,36.625 55.9,36.625
Bottom Solder:
  lines w1: 55.725,36.75 ccw(c51.225,36.275) 50.75,40.775 50.75,103.675 ccw(c49.513,109.012) 54.85,110.25 141.275,110.25 ccw(c145.775,110.725) 146.25,106.225 146.25,41.725 ccw(c146.725,37.225) 142.225,36.75 55.8,36.75 ; 55.825,36.625 ccw(c51.325,36.15) 50.85,40.65 50.85,103.55 ccw(c49.612,108.887) 54.95,110.125 141.375,110.125 ccw(c145.875,110.6) 146.35,106.1 146.35,41.6 ccw(c146.825,37.1) 142.325,36.625 55.9,36.625